# Allegro board RAILLROAD.brd
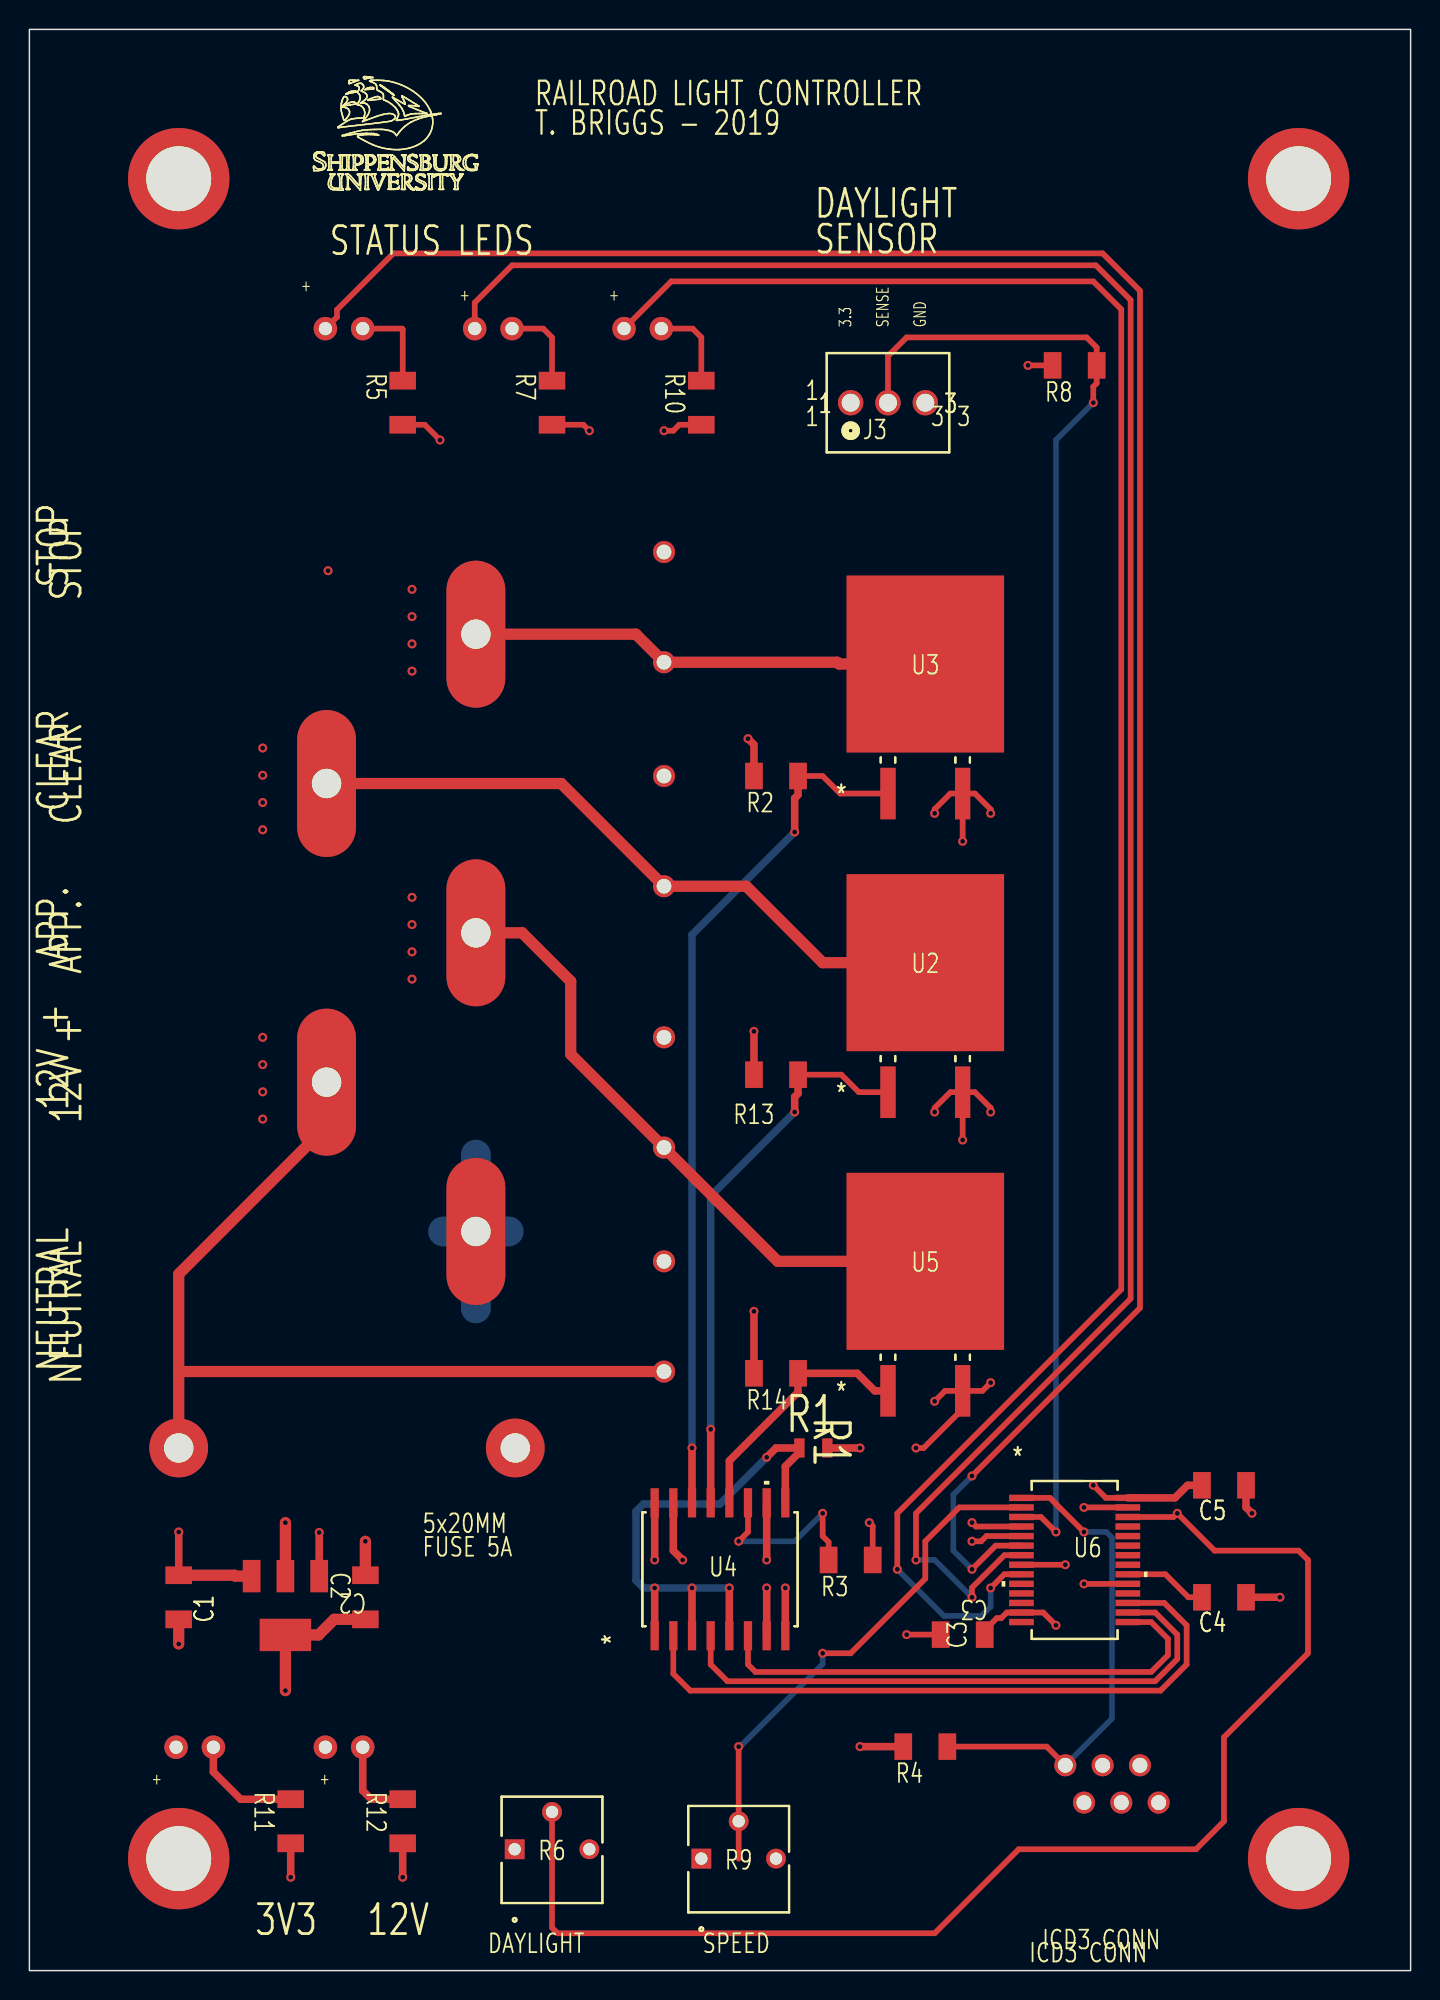
[diagram p0: board, top side]
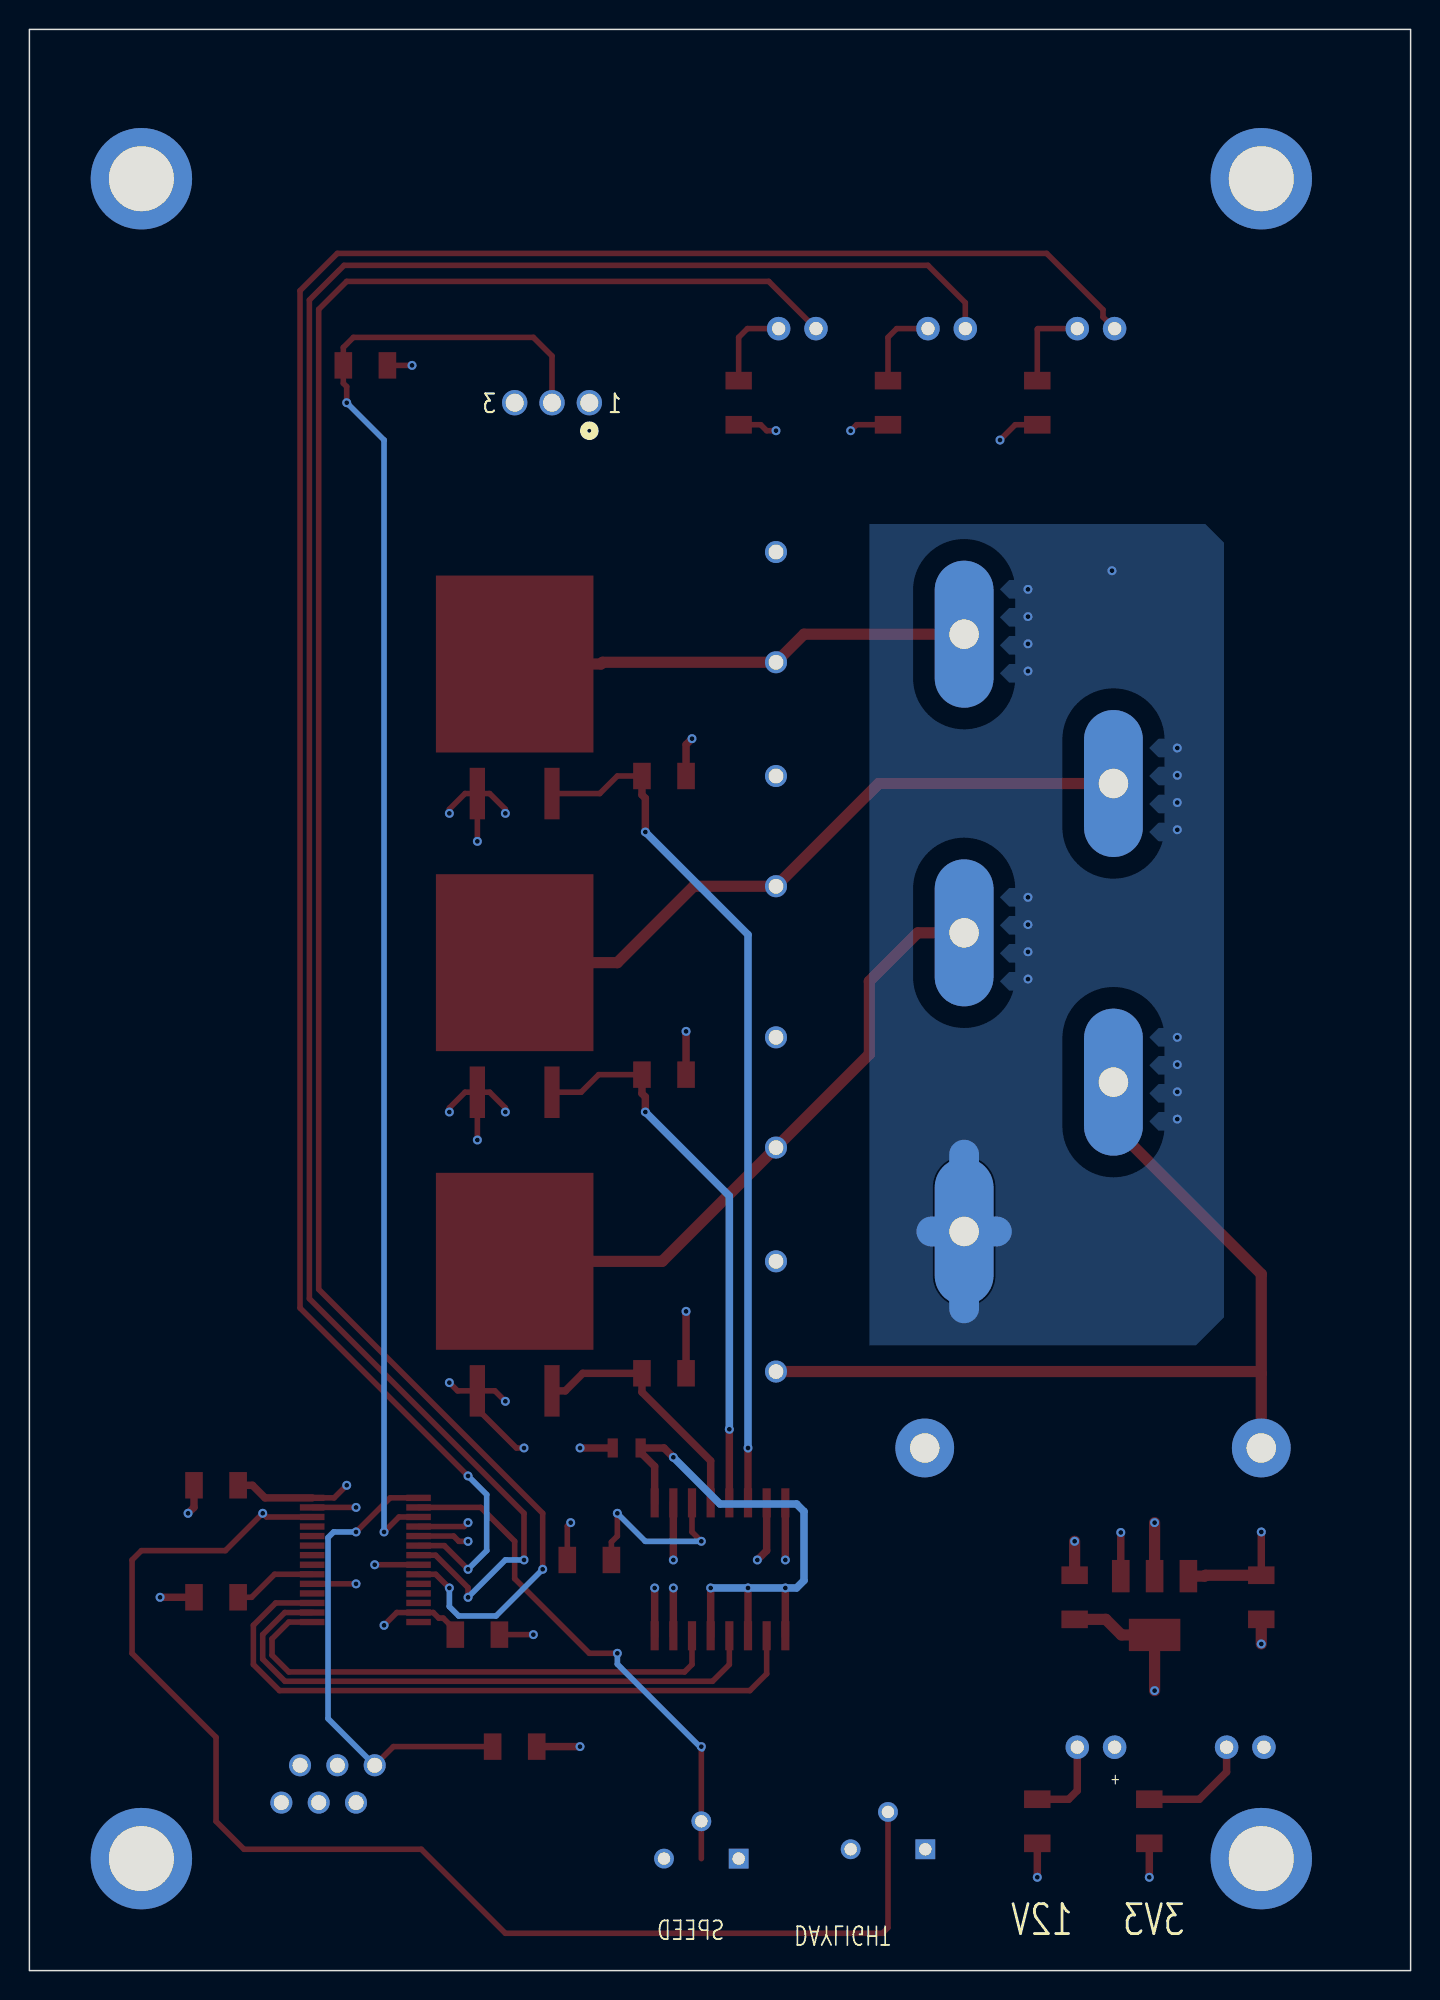
[diagram p1: board, bottom side, seen from below]

Outline 93.98 x 132.08 mm; copper layers: TOP, LAYER_1, LAYER_2, BOTTOM. Coordinates in mm from the lower left corner of the outline.
Outline path: rectangle 0,0 93.98,132.08

## Design rules (mm)
net group EXTERNAL_12V: nets APPROACH CLEAR STOP VBAT
net group INTERNAL 12V: nets 12V FET1 FET2 FET3
net group LOW VOLTAGE: nets 3V3 DAYLIGHT DAYLIGHT_SET DELAY FG1 FG2 FG3 LEDA LEDB LEDC N126171 N126705 N1208771 N1210031 N1236821 N1238051 N1337221 NMCLR PGEC PGED VCAP
nets with their own width: min track width 0.203; nets 0

## Placement (name value [footprint] x y rotation side)
C1  47uF  [SMD_CAP_1206]  10.16 25.4 90 top
C2  47uF  [SMD_CAP_1206]  22.86 25.4 270 top
C3  0.1uF  [SMD_CAP_1206]  63.5 22.86 180 top
C4  10uF  [SMD_CAP_1206]  81.28 25.4 0 top
C5  0.1uF  [SMD_CAP_1206]  81.28 33.02 0 top
D1  LED  [LED_T1]  15.24 109.22 0 top
D2  LED  [LED_T1]  25.4 109.22 0 top
D3  LED  [LED_T1]  35.56 109.22 0 top
D4  LED  [LED_T1]  5.08 12.7 0 top
D5  LED  [LED_T1]  15.24 12.7 0 top
F1  FUSE  [FUSE-FX0321]  10.16 35.56 0 top
J1  Phoenix 1017529  [PHOENIX-1017529]  5.08 96.52 270 top
J2  A31411-ND RJ24 6-Pos Conn  [A31411-ND]  68.58 5.08 0 top
J3  282834-3  [CONN_282834-3]  55.88 106.68 0 top
MOV1  MLV0603E31403T  [MOV10D]  43.18 48.26 270 top
MOV2  MLV0603E31403T  [MOV10D]  43.18 96.52 270 top
MOV3  MLV0603E31403T  [MOV10D]  43.18 81.28 270 top
MOV4  MLV0603E31403T  [MOV10D]  43.18 63.5 270 top
NOREF  -  []  0 0 90 top
NOREF#2  -  []  0 132.08 0 top
NOREF#3  -  []  -34.92 77.47 0 top
NOREF#4  -  [unnamed#2]  10.16 121.92 0 top
NOREF#5  -  [unnamed#2]  86.36 121.92 0 top
NOREF#6  -  [unnamed#2]  10.16 7.62 0 top
NOREF#7  -  [unnamed#2]  86.36 7.62 0 top
R1  1k  [SMD_RES_0805]  53.34 35.56 0 top
R2  10k  [SMD_RES_1206]  50.8 81.28 0 top
R3  10k  [SMD_RES_1206]  55.88 27.94 0 top
R4  10k  [SMD_RES_1206]  60.96 15.24 0 top
R5  1K  [SMD_RES_1206]  25.4 106.68 270 top
R6  3362P-1-103LF  [POT_3362P]  33.02 8.26 0 top
R7  1K  [SMD_RES_1206]  35.56 106.68 270 top
R8  1K  [SMD_RES_1206]  71.12 109.22 0 top
R9  3362P-1-103LF  [POT_3362P]  45.72 7.62 0 top
R10  1K  [SMD_RES_1206]  45.72 106.68 270 top
R11  1K  [SMD_RES_1206]  17.78 10.16 270 top
R12  1K  [SMD_RES_1206]  25.4 10.16 270 top
R13  10k  [SMD_RES_1206]  50.8 60.96 0 top
R14  10k  [SMD_RES_1206]  50.8 40.64 0 top
U1  -  [AZ1117]  20.32 27.94 180 top
U2  IRF9530SPBF  [D2PAK]  60.96 68.58 0 top
U3  IRF9530SPBF  [D2PAK]  60.96 88.9 0 top
U4  TC4469COE  [SOIC16-W_MC]  46.99 27.3 90 top
U5  IRF9530SPBF  [D2PAK]  60.96 48.26 0 top
U6  PIC32MX130F064B-ISS  [SSOP28_MC]  71.12 27.94 0 top

## Library data of the parts
C1-C5 = C
D1-D5 = LED
F1 = FUSE
J1 = Phoenix 1017529
J2 = A31411-ND RJ24 6-Pos Conn
J3 = 282834-3: User Part Number: PN; Tolerance: TOL
MOV1-MOV4 = MLV0603E31403T: tolerance: 0
R1-R5 R7 R8 R10-R14 = R
R6 R9 = 3362P-1-103LF: User Part Number: PN; Tolerance: TOL
U1 = AZ1117
U2 U3 U5 = IRF9530SPBF_0: User Part Number: PN; Tolerance: TOL
U4 = TC4469COE: User Part Number: PN; Tolerance: TOL
U6 = PIC32MX130F064B-ISS_0: User Part Number: PN; Tolerance: TOL

## Footprints (pads in the part's own frame, mm; a bottom-side part is the same pattern mirrored in y, then rotated)
A31411-ND
  round 0 hole 3.353 unplated: (0,0) (10.16,0)
  round 1.5 hole 1.016: 1(1.905,8.89) 2(3.175,6.35) 3(4.445,8.89) 4(5.715,6.35) 5(6.985,8.89) 6(8.255,6.35)
AZ1117
  rect 1.2x2.2 smd: 1(0.6,1.1) 2(2.9,1.1) 3(5.2,1.1)
  rect 3.5x2.2 smd: 4(2.9,5.1)
CONN_282834-3
  round 1.727 hole 1.219: 1(0,0) 2(2.54,0) 3(5.08,0)
D2PAK
  rect 1.041x3.505 smd: 1(-2.54,-8.814) 3(2.54,-8.814)
  rect 10.719x12.04 smd: 2(0,0)
FUSE-FX0321
  round 4 hole 2: 1(0,0) 2(22.9,0)
LED_T1
  round 1.6 hole 0.9: 1(7.44,2.5) 2(4.9,2.5)
MOV10D
  round 1.5 hole 1: 1(0,0) 2(7.5,0)
PHOENIX-1017529
  oval 10x4 hole 2: 1(5.59,25.3) 2(15.75,15.14) 3(25.91,25.3) 4(36.07,15.14) 5(46.23,25.3)
POT_3362P
  rect 1.346x1.346 hole 0.838: 1(0,0)
  round 1.346 hole 0.838: 2(2.54,2.54) 3(5.08,0)
SMD_CAP_1206
  rect 1.2x1.8 smd: 1(-1.5,0) 2(1.5,0)
SMD_RES_0805
  rect 0.7x1.3 smd: 1(-0.95,0) 2(0.95,0)
SMD_RES_1206
  rect 1.2x1.8 smd: 1(-1.5,0) 2(1.5,0)
SOIC16-W_MC
  rect 1.981x0.559 smd: 1(-4.521,4.445) 2(-4.521,3.175) 3(-4.521,1.905) 4(-4.521,0.635) 5(-4.521,-0.635) 6(-4.521,-1.905) 7(-4.521,-3.175) 8(-4.521,-4.445) 9(4.521,-4.445) 10(4.521,-3.175) 11(4.521,-1.905) 12(4.521,-0.635) 13(4.521,0.635) 14(4.521,1.905) 15(4.521,3.175) 16(4.521,4.445)
SSOP28_MC
  rect 1.676x0.432 smd: 1(-3.619,4.225) 2(-3.619,3.575) 3(-3.619,2.925) 4(-3.619,2.275) 5(-3.619,1.625) 6(-3.619,0.975) 7(-3.619,0.325) 8(-3.619,-0.325) 9(-3.619,-0.975) 10(-3.619,-1.625) 11(-3.619,-2.275) 12(-3.619,-2.925) 13(-3.619,-3.575) 14(-3.619,-4.225) 15(3.619,-4.225) 16(3.619,-3.575) 17(3.619,-2.925) 18(3.619,-2.275) 19(3.619,-1.625) 20(3.619,-0.975) 21(3.619,-0.325) 22(3.619,0.325) 23(3.619,0.975) 24(3.619,1.625) 25(3.619,2.275) 26(3.619,2.925) 27(3.619,3.575) 28(3.619,4.225)
unnamed#2
  round 6.9 hole 4.42: (0,0)

## Nets
3V3: C2.2 C3.1 C5.1 D4.2 J2.2 J3.1 R1.2 R4.1 R6.1 R9.3 U1.2 U1.4(OUT#4) U6.13 U6.28
12V: C1.2 D5.2 F1.2 R2.1 R13.1 R14.1 U1.3 U2.3(S) U3.3(S) U4.15 U4.16(VDD_1) U5.3(S)
VBAT: F1.1 J1.4 MOV1.2
0: C1.1 C2.1 C3.2 C4.2 C5.2 J1.5 J2.3 J2.6 J3.3 MOV1.1 MOV2.1 MOV3.1 MOV4.1 R3.2 R5.2 R6.3 R7.2 R8.1 R9.1 R10.2 R11.2 R12.2 U1.1 U4.7 U4.8 U4.10 U6.8 U6.19(VSS_1) U6.27
APPROACH: J1.3 MOV4.2 U5.2
CLEAR: J1.2 MOV3.2 U2.2
DAYLIGHT: J3.2 R8.2 U6.3
DAYLIGHT_SET: R6.2 U6.26
DELAY: R9.2 U6.2
FET1: U4.2 U6.17
FET2: U4.4 U6.16
FET3: U4.6 U6.15
FG1: R2.2 U3.1 U4.14
FG2: R13.2 U2.1 U4.13
FG3: R14.2 U4.12 U5.1
LEDA: D1.2 U6.6
LEDB: D2.2 U6.7
LEDC: D3.2 U6.9
NMCLR: J2.1 R4.2 U6.1
PGEC: J2.5 U6.5
PGED: J2.4 U6.4
STOP: J1.1 MOV2.2 U3.2
VCAP: C4.1 U6.20
N126171: R3.1 U4.11
N126705: R1.1 U4.1 U4.3 U4.5 U4.9
N1208771: D1.1(CATHODE) R5.1
N1210031: D2.1(CATHODE) R7.1
N1236821: D3.1(CATHODE) R10.1
N1238051: D4.1(CATHODE) R11.1
N1337221: D5.1(CATHODE) R12.1

Pads without a net: U6 10 11 12 14 18 21 22 23 24 25

## Via types
v1: diameter 0.61, hole 0.33, TOP to BOTTOM, 81 vias

## Routing (per net, layer and track width the routed paths; a pad name or vN(x,y) marks a point on that pad's centre or on a via; arc(x,y) is an arc through that point)
3V3: length 51.2
  TOP w0.381: v1(69.85,23.49) 68.98,24.36 U6.13 66.51,24.36 66.12,23.98 65.82,23.98 65,23.16 C3.1 ; v1(72.39,33.02) 73.24,32.17 U6.28
  TOP w0.508: C5.1 78.8,33.02 77.94,32.17 U6.28 ; R1.2 v1(56.52,35.56) ; R4.1 v1(56.52,15.24)
  TOP w0.762: v1(17.42,19.05) U1.4 19.68,22.84 20.74,23.9 C2.2 ; U1.2 v1(17.42,30.48)
  LAYER_2 w0.203: R9.3 50.8,8.52 ; R9.3 51.7,7.62 ; R9.3 49.9,7.62 ; R9.3 50.8,6.72 ; 55.88,105.59 J3.1 ; J3.1 55.88,107.77 ; J3.1 54.79,106.68 ; J3.1 56.97,106.68 ; 8.95,15.2 D4.2 ; D4.2 9.98,16.23 ; D4.2 11.01,15.2 ; D4.2 9.98,14.17 ; R6.1 33.02,9.16 ; R6.1 33.02,7.35 ; R6.1 32.12,8.26 ; R6.1 33.92,8.26 ; 70.78,11.43 J2.2 ; J2.2 71.75,10.45 ; J2.2 72.73,11.43
12V: length 65.7
  TOP w0.381: U2.3 v1(63.5,56.51) ; U2.3 62.66,59.77 61.59,58.7 v1(61.59,58.42) ; U2.3 64.34,59.77 65.41,58.7 v1(65.41,58.42) ; v1(65.41,40.01) 64.85,39.45 U5.3 ; U5.3 62.31,39.45 v1(61.59,38.74) ; U5.3 63.5,38.21 60.85,35.56 v1(60.33,35.56) ; U3.3 v1(63.5,76.84) ; U3.3 62.66,80.09 61.59,79.02 v1(61.59,78.74) ; U3.3 64.34,80.09 65.41,79.02 v1(65.41,78.74)
  TOP w0.508: R13.1 v1(49.3,63.9) ; U4.15 43.81,28.57 v1(44.45,27.94) ; v1(48.89,83.82) 49.3,83.42 R2.1 ; C1.2 v1(10.16,29.85) ; R14.1 v1(49.3,44.85) ; U4.16 v1(42.55,27.94)
  TOP w0.762: U1.3 14.01,26.84 13.95,26.9 C1.2
  LAYER_2 w0.635: F1.2 35.29,35.56 ; F1.2 33.06,33.33 ; F1.2 33.06,37.79 ; F1.2 30.83,35.56 ; D5.2 20.14,16.23 ; D5.2 21.17,15.2 ; D5.2 19.11,15.2 ; D5.2 20.14,14.17
VBAT: length 62.1
  TOP w0.381: 10.28,40.76 10.16,40.64
  TOP w0.762: F1.1 10.16,47.39 20.22,57.45 J1.4 ; MOV1.2 10.28,40.76
0: length 115.2
  TOP w0.381: U6.8 v1(70.49,27.61) ; R3.2 57.38,30.25 v1(57.15,30.48) ; R10.2 44.22,105.18 43.81,104.78 v1(43.18,104.78) ; v1(27.94,104.14) 26.9,105.18 R5.2 ; U6.27 v1(71.75,31.52) ; R7.2 37.7,105.18 v1(38.1,104.78) ; C3.2 v1(59.69,22.86) ; R8.1 v1(67.94,109.22) ; U6.19 v1(71.75,26.31)
  TOP w0.508: R11.2 v1(17.78,6.35) ; U4.7 v1(50.17,26.04) ; U4.8 v1(51.44,26.04) ; v1(83.19,31.12) 82.78,31.52 C5.2 ; U4.10 v1(50.17,27.94) ; R12.2 v1(25.4,6.35) ; C4.2 v1(85.09,25.4) ; U1.1 v1(19.72,29.81)
  TOP w0.762: C2.1 v1(22.86,29.21) ; C1.1 v1(10.16,22.23)
  LAYER_1 w0.203: MOV3.1 43.18,82.26 ; MOV3.1 42.2,81.28 ; MOV3.1 44.16,81.28 ; MOV3.1 43.18,80.3 ; R6.3 39,8.26 ; R6.3 37.2,8.26 ; R6.3 38.1,9.16 ; R6.3 38.1,7.35 ; MOV1.1 44.16,48.26 ; MOV1.1 42.2,48.26 ; MOV1.1 43.18,49.24 ; MOV1.1 43.18,47.28 ; J2.6 77.81,11.43 ; J2.6 76.84,12.41 ; J2.6 75.86,11.43 ; J2.6 76.84,10.45 ; 45.72,6.72 R9.1 ; R9.1 45.72,8.52 ; R9.1 44.82,7.62 ; R9.1 46.62,7.62 ; MOV2.1 43.18,97.5 ; MOV2.1 42.2,96.52 ; MOV2.1 44.16,96.52 ; MOV2.1 43.18,95.54 ; MOV4.1 44.16,63.5 ; MOV4.1 43.18,62.52 ; MOV4.1 43.18,64.48 ; MOV4.1 42.2,63.5 ; 73.03,12.99 J2.3 ; J2.3 73.03,14.95 ; J2.3 72.05,13.97 ; J2.3 74,13.97 ; 59.87,106.68 J3.3 ; J3.3 60.96,105.59 ; J3.3 62.05,106.68 ; J3.3 60.96,107.77
  LAYER_1 w2.032: J1.5 30.38,55.52 ; J1.5 30.38,45.06 ; J1.5 28.15,50.29 ; J1.5 32.61,50.29
  BOTTOM w2.032: J1.5 32.61,50.29 ; J1.5 30.38,55.52 ; J1.5 30.38,45.06 ; J1.5 28.15,50.29
  vias: v1(15.88,83.19) v1(15.88,81.33) v1(15.88,79.48) v1(15.88,77.62) v1(15.88,63.5) v1(15.88,61.65) v1(15.88,59.79) v1(15.88,57.94) v1(20.32,95.25) v1(26.03,93.98) v1(26.03,92.13) v1(26.03,90.27) v1(26.03,88.42) v1(26.03,73.03) v1(26.03,71.17) v1(26.03,69.32) v1(26.03,67.46)
APPROACH: length 42.7
  TOP w0.762: U5.2 50.92,48.26 MOV4.2 36.83,62.35 36.83,67.31 33.53,70.61 J1.3
CLEAR: length 45.8
  TOP w0.762: U2.2 53.97,68.58 48.78,73.78 MOV3.2 36.19,80.77 J1.2
DAYLIGHT: length 102.7
  TOP w0.381: U6.3 68.83,30.87 v1(69.85,29.85) ; J3.2 58.42,109.85 59.69,111.12 71.93,111.12 72.62,110.44 R8.2 72.62,108 72.39,107.77 v1(72.39,106.68)
  BOTTOM w0.381: v1(69.85,29.85) 69.85,104.14 v1(72.39,106.68)
DAYLIGHT_SET: length 90.7
  TOP w0.381: U6.26 77.86,30.87 v1(78.1,31.12) 80.65,28.57 86.36,28.57 87,27.94 87,21.59 81.28,15.88 81.28,10.16 79.38,8.26 67.31,8.26 61.59,2.54 35.94,2.54 35.56,2.92 R6.2
DELAY: length 35.7
  TOP w0.381: v1(48.26,15.24) R9.2 48.26,7.62 ; v1(53.97,21.59) 55.88,21.59 60.96,26.67 60.96,29.21 63.27,31.52 U6.2
  BOTTOM w0.381: v1(53.97,21.59) 53.97,20.85 48.36,15.24 ; 48.36,15.24 v1(48.26,15.24) ; 48.36,15.24 48.21,15.09
FET1: length 46
  TOP w0.381: U6.17 77.22,25.01 78.74,23.49 78.74,20.83 76.96,19.05 44.96,19.05 43.81,20.19 U4.2
FET2: length 40.5
  TOP w0.381: 46.36,22.78 46.36,20.83 47.5,19.69 76.59,19.69 78.1,21.2 78.1,22.86 76.6,24.36 U6.16
FET3: length 35.5
  TOP w0.381: U4.6 48.89,20.83 49.4,20.32 76.33,20.32 77.47,21.46 77.47,22.57 76.33,23.71 U6.15
FG1: length 59.1
  TOP w0.381: U3.1 55.17,80.09 53.97,81.28 R2.2
  TOP w0.508: R2.2 52.3,80 52.07,79.77 v1(52.07,77.47) ; U4.14 v1(45.08,35.56)
  BOTTOM w0.508: v1(45.08,35.56) 45.08,70.49 v1(52.07,77.47)
FG2: length 38.2
  TOP w0.381: R13.2 55.25,60.96 56.44,59.77 U2.1
  TOP w0.508: 46.36,31.83 v1(46.36,36.83) ; R13.2 52.3,59.68 52.07,59.45 v1(52.07,58.42)
  BOTTOM w0.508: v1(52.07,58.42) 46.36,52.71 v1(46.36,36.83)
FG3: length 17.4
  TOP w0.508: U4.12 47.62,34.68 52.3,39.36 R14.2 56.32,40.64 57.52,39.45 U5.1
LEDA: length 155.7
  TOP w0.381: D1.2 20.93,112.51 20.93,113.01 24.76,116.84 73.03,116.84 75.56,114.3 75.56,45.09 v1(64.14,33.65) ; U6.6 65.75,28.92 v1(64.14,27.3)
  BOTTOM w0.381: v1(64.14,33.65) 62.86,32.38 62.86,28.57 v1(64.14,27.3)
LEDB: length 150
  TOP w0.381: U6.7 66.34,28.27 64.14,26.06 v1(64.14,25.4) ; D2.2 30.3,113.48 32.84,116.02 72.57,116.02 74.93,113.66 74.93,45.72 60.33,31.12 v1(60.33,27.94)
  BOTTOM w0.381: v1(60.33,27.94) 61.59,27.94 v1(64.14,25.4)
LEDC: length 139.7
  TOP w0.381: v1(65.41,26.04) 66.33,26.96 U6.9 ; D3.2 43.67,114.94 72.39,114.94 74.29,113.03 74.29,46.35 59.06,31.12 v1(59.06,27.3)
  BOTTOM w0.381: v1(59.06,27.3) 62.23,24.13 64.77,24.13 65.41,24.76 v1(65.41,26.04)
NMCLR: length 32.6
  TOP w0.381: J2.1 69.22,15.24 R4.2 ; v1(71.75,29.85) 69.43,32.17 U6.1
  BOTTOM w0.381: J2.1 73.66,17.15 73.66,29.46 73.28,29.85 v1(71.75,29.85)
PGEC: length 29.6
  TOP w0.381: U6.5 65.11,29.57 64.76,29.21 v1(64.14,29.21)
  LAYER_2 w0.381: v1(64.14,29.21) 64.77,28.57 75.18,28.57 75.56,28.19 75.56,13.97
PGED: length 30
  TOP w0.381: U6.4 64.4,30.22 v1(64.14,30.48)
  LAYER_2 w0.381: v1(64.14,30.48) 63.5,30.48 62.86,29.85 62.86,19.69 69.85,12.7 73.03,12.7 J2.4
STOP: length 31.4
  TOP w0.762: U3.2 55.09,88.9 54.97,89.02 MOV2.2 41.27,90.93 J1.1
VCAP: length 5.7
  TOP w0.381: C4.1 78.86,25.4 77.3,26.96 U6.20
N126171: length 12.7
  TOP w0.381: U4.11 48.89,29.85 v1(48.26,29.21) ; v1(53.97,31.12) 53.97,29.56 54.38,29.16 R3.1
  BOTTOM w0.381: v1(53.97,31.12) 52.07,29.21 v1(48.26,29.21)
N126705: length 38
  TOP w0.508: U4.3 v1(45.08,26.04) ; U4.5 v1(47.62,26.04) ; U4.9 51.44,34.3 52.39,35.26 R1.1 50.8,35.56 v1(50.17,34.93) ; U4.1 v1(42.55,26.04)
  BOTTOM w0.508: v1(47.62,26.04) v1(45.08,26.04) v1(42.55,26.04) 41.78,26.04 41.28,26.54 41.28,31.24 41.78,31.75 46.99,31.75 v1(50.17,34.93)
N1208771: length 6.2
  TOP w0.381: D1.1 25.36,111.72 25.4,111.68 R5.1
N1210031: length 5.9
  TOP w0.381: D2.1 34.96,111.72 35.56,111.12 R7.1
N1236821: length 5.9
  TOP w0.381: R10.1 45.72,111.12 45.12,111.72 D3.1
N1238051: length 7.7
  TOP w0.508: D4.1 12.52,13.52 14.37,11.66 R11.1
N1337221: length 5.9
  TOP w0.508: R12.1 23.26,11.66 22.68,12.25 D5.1

## Copper pours and planes (outline as drawn; the poured copper is in the pictures)
3V3 on LAYER_2: 47.62,113.03 91.44,113.03 91.44,1.27 5.08,1.27 5.08,33.02 47.62,33.02 47.62,37.46 53.97,37.46 53.97,38.1 69.22,38.1 69.22,96.52 47.62,96.52
12V on LAYER_2: 67.31,38.74 62.86,34.29 59.69,34.29 59.06,34.93 59.06,35.56 57.78,36.83 52.07,36.83 46.36,31.12 46.36,27.3 45.72,26.67 41.91,26.67 41.27,27.31 41.27,31.12 40,32.38 21.59,32.38 21.59,13.34 18.42,13.34 18.42,32.38 13.33,32.38 12.06,31.12 12.06,29.21 11.43,28.57 9.53,28.57 8.89,29.21 8.89,30.48 13.33,34.93 18.42,34.93 18.42,39.37 45.72,39.37 45.72,46.99 46.36,47.63 53.34,47.63 53.34,61.6 47.62,61.6 47.62,66.04 53.34,66.04 53.34,81.91 52.7,82.55 48.26,82.55 47.62,83.19 47.62,84.46 48.26,85.09 67.31,85.09
0 on BOTTOM: 26.67,90.81 27.31,90.81 27.94,90.17 27.31,89.53 26.67,89.53
0 on BOTTOM: 16.51,58.42 17.14,58.42 17.78,57.79 17.14,57.15 16.51,57.15
0 on BOTTOM: 16.51,60.32 17.14,60.32 17.78,59.69 17.14,59.05 16.51,59.05
0 on BOTTOM: 26.67,69.85 27.31,69.85 27.94,69.22 27.31,68.58 26.67,68.58
0 on BOTTOM: 16.51,78.1 17.14,78.1 17.78,77.47 17.14,76.84 16.51,76.84
0 on BOTTOM: 26.67,88.9 27.31,88.9 27.94,88.26 27.31,87.63 26.67,87.63
0 on BOTTOM: 26.67,92.71 27.31,92.71 27.94,92.07 27.31,91.44 26.67,91.44
0 on BOTTOM: 16.51,62.23 17.14,62.23 17.78,61.6 17.14,60.96 16.51,60.96
0 on BOTTOM: 16.51,81.91 17.14,81.91 17.78,81.28 17.14,80.65 16.51,80.65
0 on BOTTOM: 16.51,64.13 17.14,64.13 17.78,63.5 17.14,62.87 16.51,62.87
0 on BOTTOM: 26.67,67.94 27.31,67.94 27.94,67.31 27.31,66.68 26.67,66.68
0 on BOTTOM: 26.67,71.75 27.31,71.75 27.94,71.12 27.31,70.49 26.67,70.49
0 on BOTTOM: 16.51,80.01 17.14,80.01 17.78,79.38 17.14,78.74 16.51,78.74
0 on BOTTOM: 26.67,73.66 27.31,73.66 27.94,73.03 27.31,72.39 26.67,72.39
0 on BOTTOM: 16.51,83.82 17.14,83.82 17.78,83.19 17.14,82.55 16.51,82.55
0 on BOTTOM: 26.67,94.61 27.31,94.61 27.94,93.98 27.31,93.34 26.67,93.34
0 on BOTTOM: 36.83,42.54 36.83,98.42 13.97,98.42 12.7,97.16 12.7,44.45 14.61,42.54
0 on LAYER_1: 1.02,130.17 92.96,130.17 92.96,1.27 1.02,1.27

## Text on the board
Ref Des/Silkscreen Bottom: + | SPEED | DAYLIGHT | 3V3 | 12V
Ref Des/Silkscreen Top: + | 3.3 | SENSE | GND | 5x20MM | FUSE 5A | DAYLIGHT | SPEED | ICD3 CONN | RAILROAD LIGHT CONTROLLER | T. BRIGGS - 2019 | STATUS LEDS | SENSOR | 3V3 | 12V | STOP | CLEAR | APP. | 12V + | NEUTRAL
